# Altium PCB rev2.PcbDoc
Units mm, origin at the board's own origin, x right, y up, seen from the top; angles counter-clockwise.
Board outline 33.7 x 46 mm, 2 copper layers (Top Layer, Bottom Layer); 18 components, 2 nets, 48 pads, 5 vias.
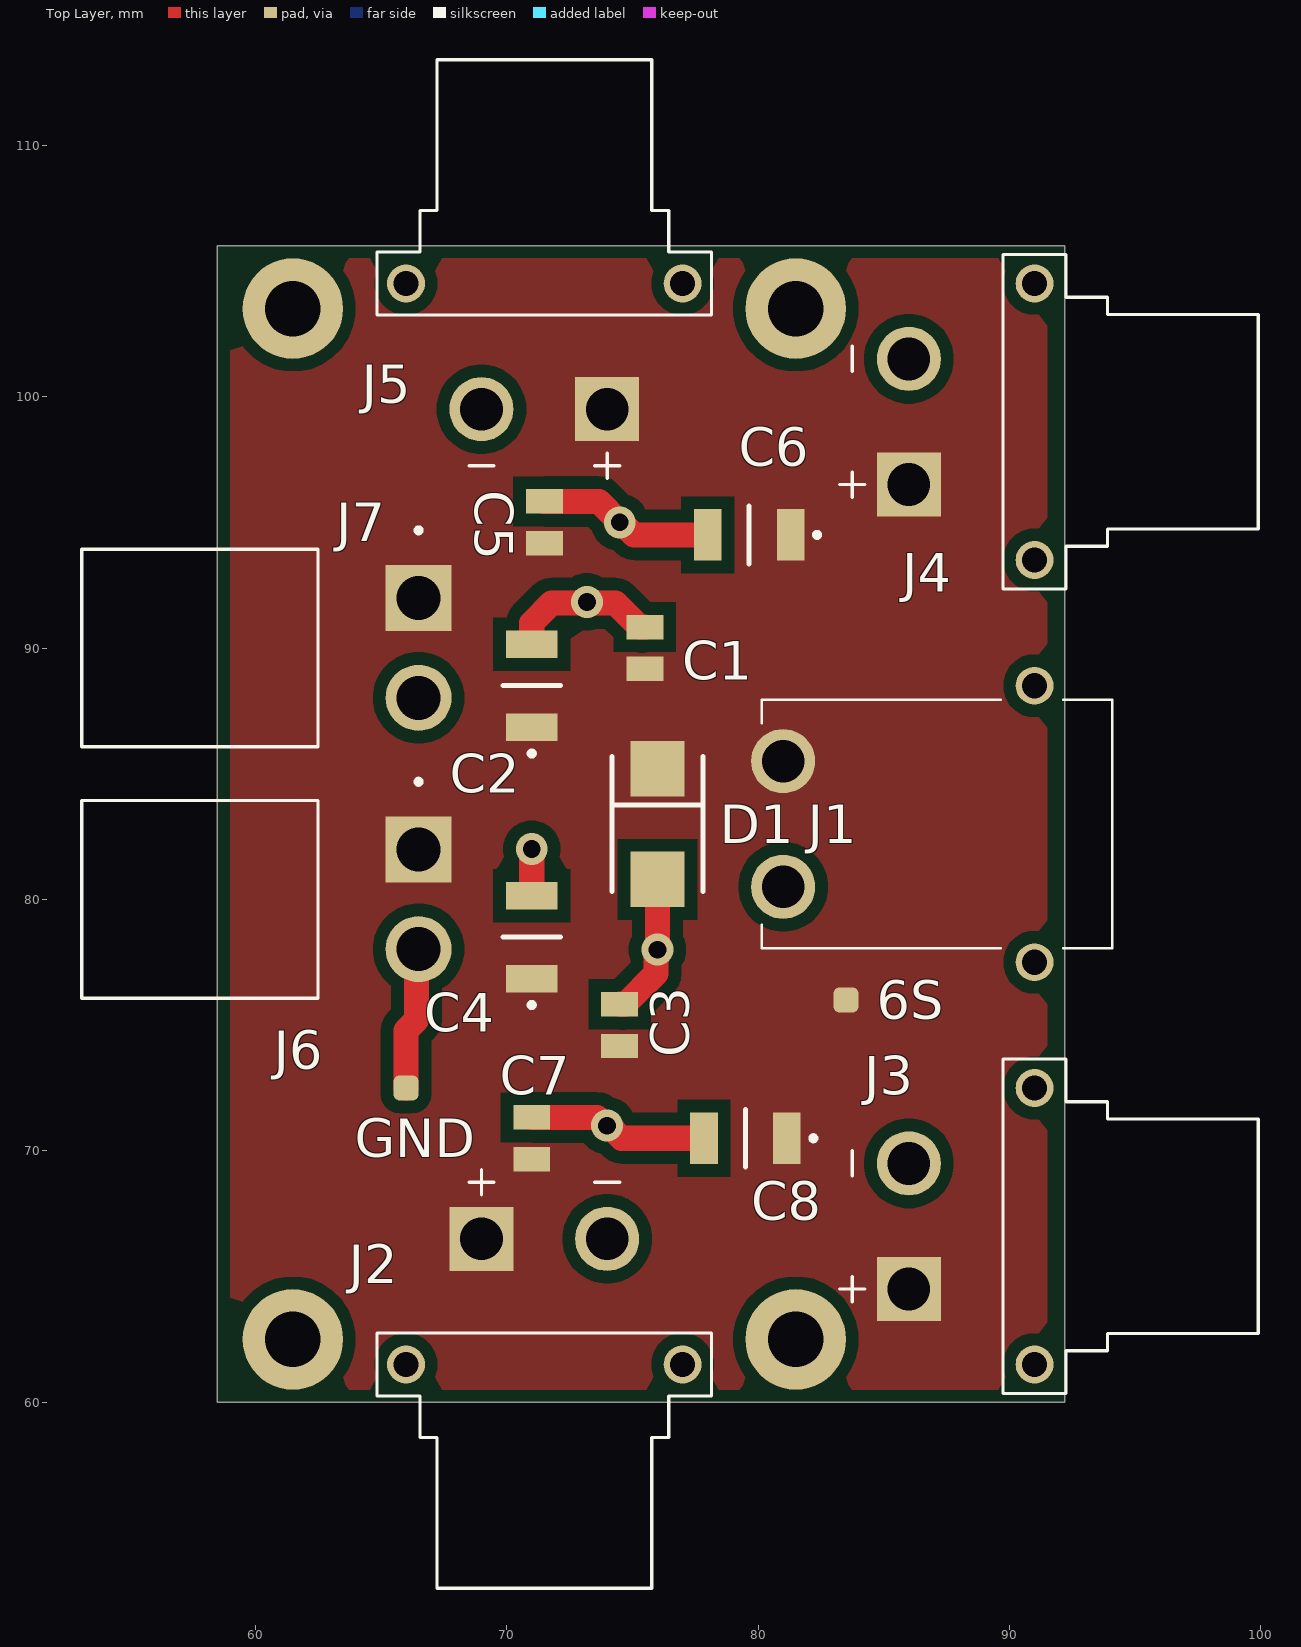
[diagram p0: Top Layer view]
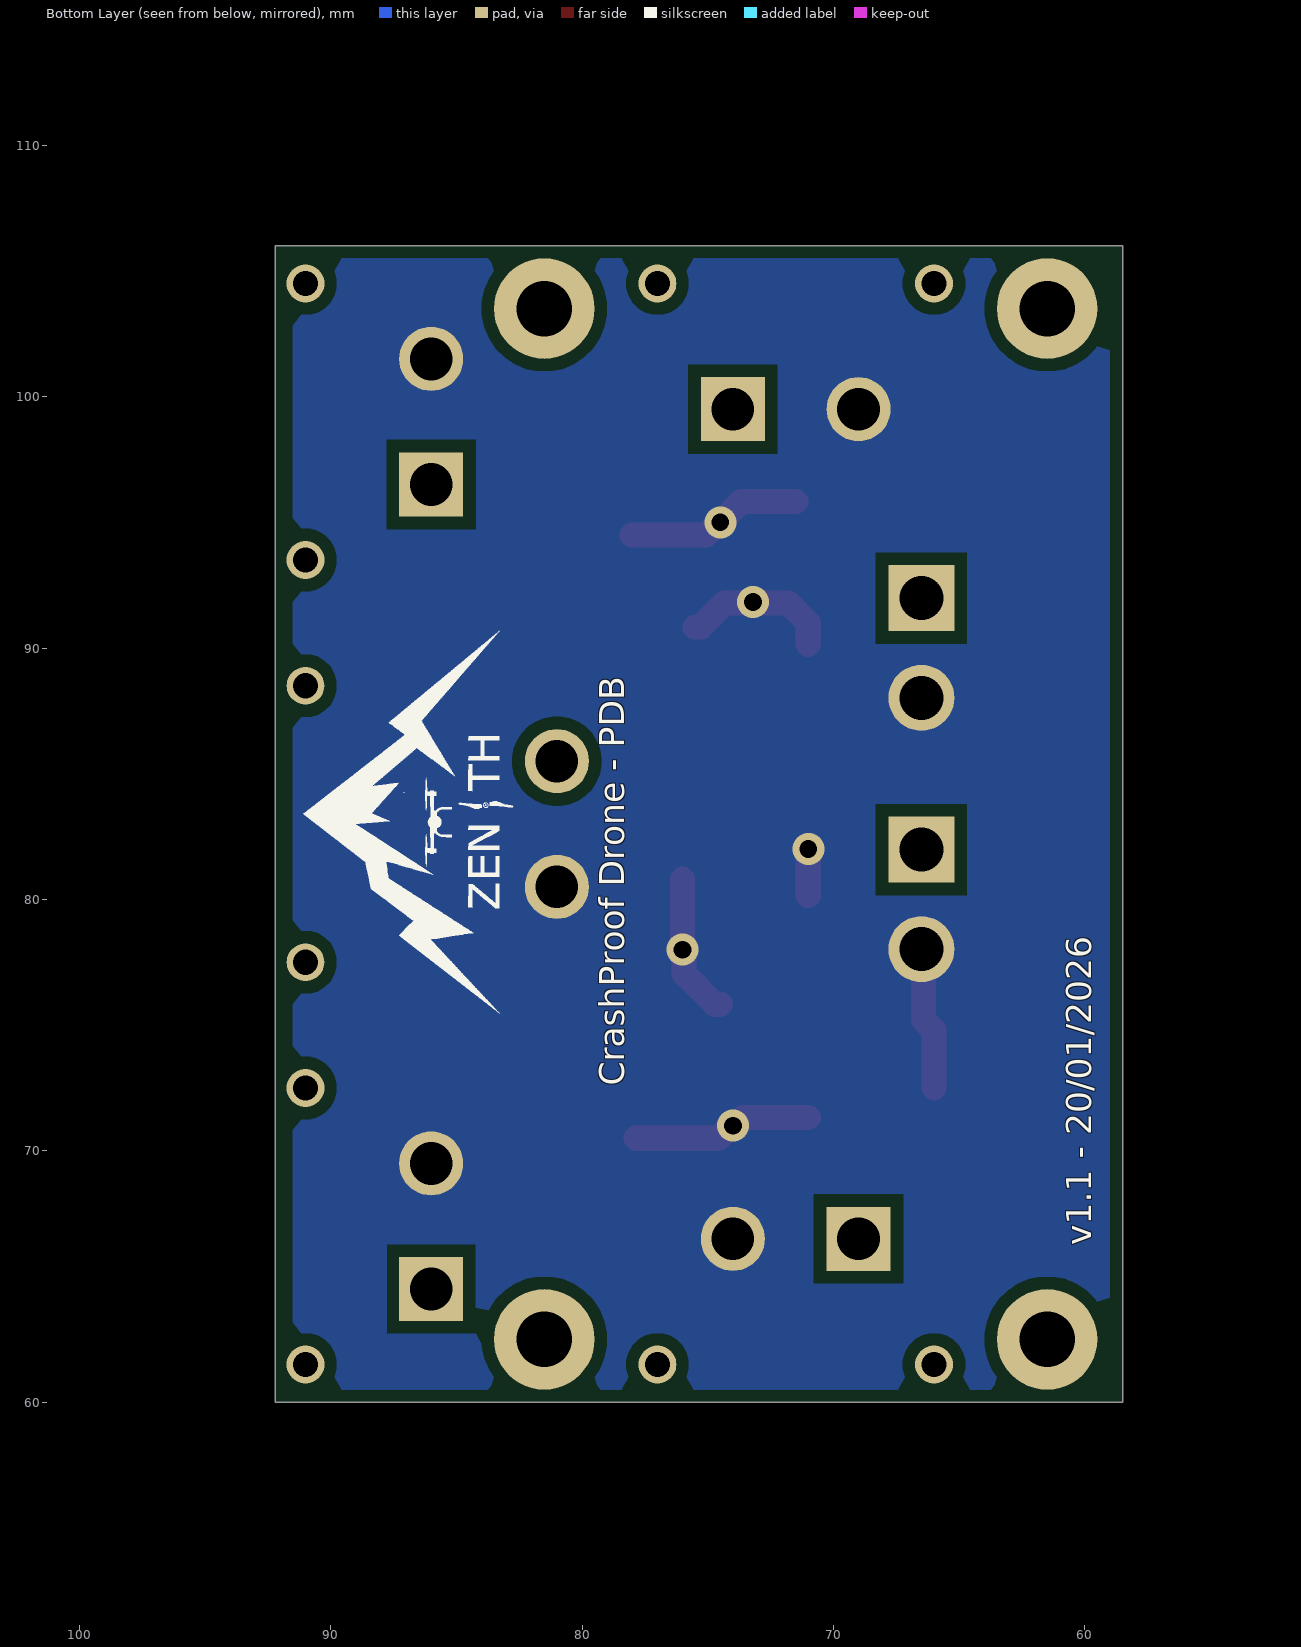
[diagram p1: Bottom Layer view, seen from below]
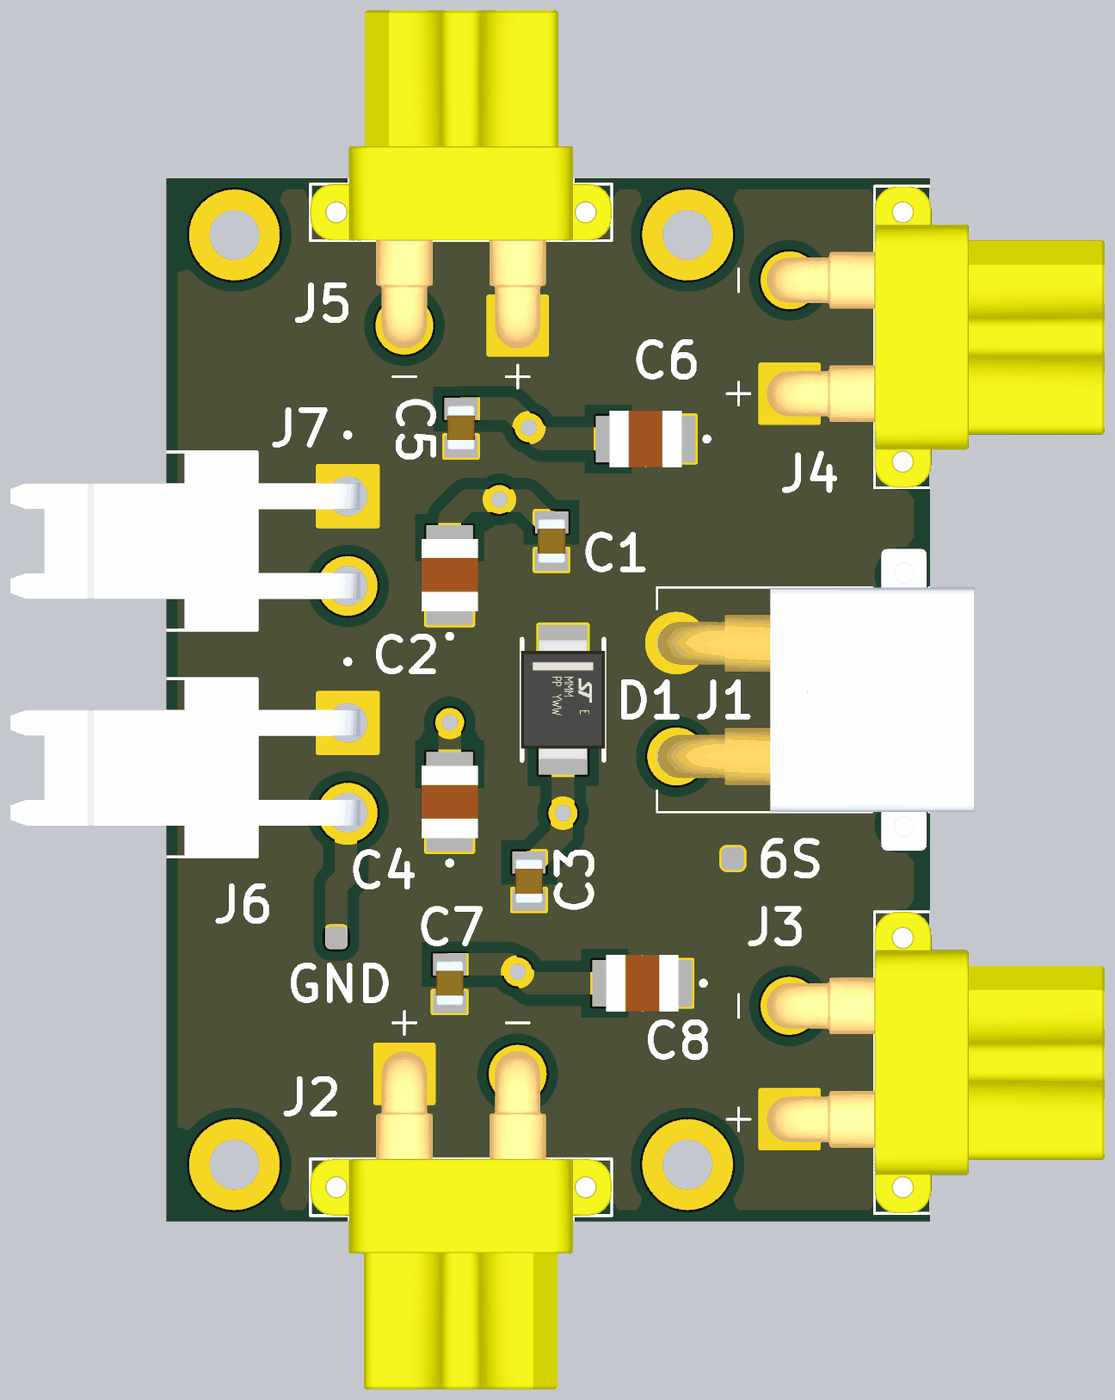
[diagram p2: 3D render of the assembled board from above, using the file's embedded part models]

## Layer stack, top to bottom
Top Solder: solder mask 0.0102, Solder Resist, Dk 3.5
Top Layer: signal copper 0.0356
Dielectric 1: dielectric 0.32, FR-4, Dk 4.8
Bottom Layer: signal copper 0.0356
Bottom Solder: solder mask 0.0102, Solder Resist, Dk 3.5

## Board outline
58.5,60 58.5,106 92.2,106 92.2,60

## Design rules (kind name [scope] priority, off if disabled: settings)
BoardOutlineClearance [OnLayer('Top Layer')] p1: gap=0.3 ignorepadtopadclearanceinfootprint=FALSE except(0: Region-OutlineEdge Region-CavityEdge Region-CutoutEdge Region-SplitBarrior Region-SplitContinuation Text-OutlineEdge Text-CavityEdge Text-CutoutEdge Text-SplitBarrior Text-SplitContinuation)
BoardOutlineClearance BoardOutlineClearance_1 [OnLayer('Bottom Layer')] p2: gap=0.3 ignorepadtopadclearanceinfootprint=FALSE except(0: Region-OutlineEdge Region-CavityEdge Region-CutoutEdge Region-SplitBarrior Region-SplitContinuation Text-OutlineEdge Text-CavityEdge Text-CutoutEdge Text-SplitBarrior Text-SplitContinuation)
Clearance [All] p1: gap=0.5 ignorepadtopadclearanceinfootprint=TRUE
HoleToHoleClearance [All] p1: gap=0.5 allowstackedmicrovias=TRUE
PolygonConnect [All] p1: connectstyle=Direct reliefconductorwidth=0.254 reliefentries=4 polygonreliefangle="90 Angle" airgapwidth=0.254
RoutingVias [All] p1: holewidth=0.711 width=1.27 viastyle="Through Hole" minholewidth=0.711 minwidth=1.27 maxholewidth=0.711 maxwidth=1.27
SilkToSolderMaskClearance [IsPad] p1: minsilkscreentomaskgap=0.2 clearancetoexposedcopper=TRUE
SolderMaskExpansion [All] p1: expansion=0.102 istentingtop=FALSE
SupplyNets "Schematic Supply Nets_1" [InNet('6S')] p1: voltage=0.000
SupplyNets "Schematic Supply Nets" [InNet('GND')] p2: voltage=0.000
Width [All] p1: maxlimit=5 minlimit=0.5 preferedwidth=1 minimp=50.000000 maximp=50.000000 favimp=50.000000
28 further rules are at their usual default settings.

## Components (designator, comment, footprint, x,y, rotation, side; value= is the part's Value field where it differs from the comment)
6S "Comment" Testpoint 83.5,76 r0 top
C1 "4.7 uF 50V" CAPC2012X145N 75.5,90 r90 top
C2 "10u" GRM32x 71,88.5 r90 top
C3 "4.7 uF 50V" CAPC2012X145N 74.5,75 r90 top
C4 "10u" GRM32x 71,78.5 r90 top
C5 "4.7 uF 50V" CAPC2012X145N 71.5,95 r90 top
C6 "10u" GRM32x 79.65,94.5 r180 top
C7 "4.7 uF 50V" CAPC2012X145N 71,70.5 r90 top
C8 "10u" GRM32x 79.5,70.5 r180 top
D1 "SMBJ28A" SMBJ12A 76,83 r270 top
GND "Comment" Testpoint 66,72.5 r90 top
J1 "XT30PW-M" XT30PWM 86.912,83 r270 top
J2 "XT30PW-F" AMASS_XT30PW-F 71.5,61.5 r180 top
J3 "XT30PW-F" AMASS_XT30PW-F 91,67 r270 top
J4 "XT30PW-F" AMASS_XT30PW-F 91,99 r270 top
J5 "XT30PW-F" AMASS_XT30PW-F 71.5,104.5 r0 top
J6 "B2PS-VH_(LF)(SN)" JST_B2PS-VH_(LF)(SN) 66.5,80 r270 top
J7 "B2PS-VH_(LF)(SN)" JST_B2PS-VH_(LF)(SN) 66.5,90 r270 top

## Footprints (in the part's own frame and the unit in brackets; to place one, negate y for a bottom-side part, rotate by r counter-clockwise, add the part's x,y. Pads: shape width x height; smd on the part's side, far side on the other; paste and mask are expansions set on the pad)
AMASS_XT30PW-F [mm]
  round 2.55 hole 1.7: N(-2.5,-5)
  rect 2.55x2.55 / inner round 2.55 / far side rect 2.55x2.55 hole 1.7: P(2.5,-5)
  round 1.508 hole 1: S1(5.5,0) S2(-5.5,0)
  silkscreen extent -6.65,-7.75 6.65,8.9, body extent -6.65,-6 6.65,8.9, height 5
CAPC2012X145N [mm]
  rect 0.97x1.47 smd: 1(-0.83,0) 2(0.83,0)
  body extent -1,-0.63 1,0.63, height 1.45
GRM32x [mm]
  rect 1.1x2.05 smd: 1(-1.65,0) 2(1.65,0)
  silkscreen extent -2.8,-1.15 0,1.15, body extent -1.6,-1.25 1.6,1.25, height 2.5
JST_B2PS-VH_(LF)(SN) [mm]
  rect 2.625x2.625 / inner round 2.625 / far side rect 2.625x2.625 hole 1.75: 1(-1.98,0)
  round 2.625 hole 1.75: 2(1.98,0)
  silkscreen extent -4.78,-13.4 3.93,0.1, body extent -3.93,-14.9 3.93,0.57, height 8.5
SMBJ12A [mm]
  rect 2.2x2.15 smd: 1(-2.2,0) 2(2.2,0)
  silkscreen extent -2.68,-1.81 2.68,1.81, body extent -2.68,-1.86 2.68,1.86, height 2.33
Testpoint [mm]
  rrect50% 1x1 smd: TP(0,0)
XT30PWM [mm]
  round 2.55 hole 1.7: 1(-2.5,-5.912) 2(2.5,-5.912)
  round 1.5 hole 1: 3(5.5,4.088) 4(-5.5,4.088)
  silkscreen extent -4.95,-6.76 4.95,7.19, body extent -6.65,-6.71 6.65,7.24, height 5.06

## Part data
C1 C3 C5 C7: library part GRM21BR61H475KE51L, "Capacitor", Manufacturer_Name="Murata Electronics", Mouser Part Number=81-GRM21BR61H475KE1L, Arrow Part Number=GRM21BR61H475KE51L, Arrow Price/Stock=https://www.arrow.com/en/products/grm21br61h475ke51l/murata-manufacturing?region=nac, Datasheet Link=https://search.murata.co.jp/Ceramy/image/img/A01X/G101/ENG/GRM21BR61H475KE51-01A.pdf, Height=1.45mm, Manufacturer_Part_Number=GRM21BR61H475KE51L, Mouser Price/Stock=https://www.mouser.co.uk/ProductDetail/Murata-Electronics/GRM21BR61H475KE51L?qs=eeBpzGFlv%252B%252BOtLzDC1PY6Q%3D%3D
C2 C4 C6 C8: library part GRM32EC72A106ME05L, "Capacitor", Manufacturer_Name="Murata Electronics", Mouser Part Number=81-GRM32EC72A106ME5L, Arrow Part Number=GRM32EC72A106ME05L, Arrow Price/Stock=https://www.arrow.com/en/products/grm32ec72a106me05l/murata-manufacturing?region=nac, Datasheet Link=https://search.murata.co.jp/Ceramy/image/img/A01X/G101/ENG/GRM32EC72A106ME05-01A.pdf, Height=1.5mm, Manufacturer_Part_Number=GRM32EC72A106ME05L, Mouser Price/Stock=https://www.mouser.co.uk/ProductDetail/Murata-Electronics/GRM32EC72A106ME05L?qs=d0WKAl%252BL4KZOI4c17DDTDA%3D%3D
D1: "TVS Diode (Uni-directional)", Manufacturer_Name=STMicroelectronics, Datasheet Link=https://www.st.com/resource/en/datasheet/smbj12a.pdf, Height=2.45mm, Manufacturer_Part_Number=SMBJ28A
J1: "Connector", Manufacturer_Name=Amass, Datasheet Link=https://www.tme.eu/sl/Document/ce4077e36b79046da520ca73227e15de/XT30PW%20SPEC.pdf, Height=5mm, Manufacturer_Part_Number=XT30PW-M
J2 J3 J4 J5: "Socket; DC supply; XT30; female; PIN: 2; on PCBs; THT; yellow; 15A", Package=None, Check_prices=https://www.snapeda.com/parts/XT30PW-F/AMASS/view-part/?ref=eda, MF=amass, MP=XT30PW-F, SnapEDA_Link=https://www.snapeda.com/parts/XT30PW-F/AMASS/view-part/?ref=snap
J6 J7: "Connector Header Through Hole, Right Angle 2 position 0.156 (3.96mm)", Package=None, Check_prices=https://www.snapeda.com/parts/B2PS-VH%20(LF)(SN)/JST/view-part/?ref=eda, MF=JST, MP="B2PS-VH (LF)(SN)", SnapEDA_Link=https://www.snapeda.com/parts/B2PS-VH%20(LF)(SN)/JST/view-part/?ref=snap

## Free pads (board coordinates)
  round 4 hole 2.2: 2(61.5,62.5) 2(61.5,103.5) 2(81.5,62.5) 2(81.5,103.5)

## Via types
v1: diameter 1.27, hole 0.711, Top Layer to Bottom Layer, 5 vias

## Nets (pads, with @x,y where several pads share a name; then routed paths per layer and width w, separated by ;. In a path a pad name is that pad's centre, name@x,y a point inside that pad or via, vN(x,y) a via of type N, cw(c..) or ccw(c..) an arc to the next point about the centre after c; other vN are vias at no path point)
6S: 6S.TP C1.1 C2.1 C3.1 C4.1 C5.1 C6.1 C7.1 C8.1 D1.1 J1.1 J2.P J3.P J4.P J5.P J6.1 J7.1
GND: C1.2 C2.2 C3.2 C4.2 C5.2 C6.2 C7.2 C8.2 D1.2 GND.TP J1.2 J2.N J3.N J4.N J5.N J6.2 J7.2 | length 33.7
  Top Layer w1: GND.TP 66,74.79 66.417,75.207 66.417,77.937 J6.2 ; C7.2 73.597,71.33 73.927,71 v1(74,71) 74.073,71 74.573,70.5 C8.2 ; C4.2 v1(71,82) ; C2.2 71,91 71.783,91.783 73.142,91.783 v1(73.194,91.835) 73.245,91.783 74.327,91.783 75.28,90.83 C1.2 ; C5.2 73.67,95.83 v1(74.5,95) 74.573,95 75.073,94.5 C6.2 ; C3.2 74.72,75.83 75.948,77.058 75.948,77.948 v1(76,78) D1.2
pads on no net: J1.3 J1.4 J2.S1 J2.S2 J3.S1 J3.S2 J4.S1 J4.S2 J5.S1 J5.S2

## Polygon pours and split planes (outlines as drawn)
GND on Bottom Layer "GND_L02_P002" (solid, pour order 2): 59,105.5 91.5,105.5 91.5,61 92,60.5 59,60.5
6S on Top Layer "6S_L01_P003" (solid, pour order 3): 59,105.5 59.5,105.5 91.5,105.5 91.5,60.5 59,60.5

## Silkscreen, mask and mechanical layers (free items; w line width, h text height)
Bottom Overlay:
  drawing of 19 lines, arcs and shapes, not listed
  text "CrashProof Drone - PDB" at 78.319,72.579 h1 r270
  text "v1.1 - 20/01/2026" at 59.754,66.254 h1 r270